# Altium PCB F143-MINI-KIT-902-FE-SMA_v1-0-2b.PcbDoc
Units mm, origin at the board's own origin, x right, y up, seen from the top; angles counter-clockwise.
Board outline 78.9 x 43.1 mm, 4 copper layers (Top, GND-Plane, VDD-Plane, Bottom), stack 1.614 mm thick; 101 components, 68 nets, 305 pads, 332 vias.
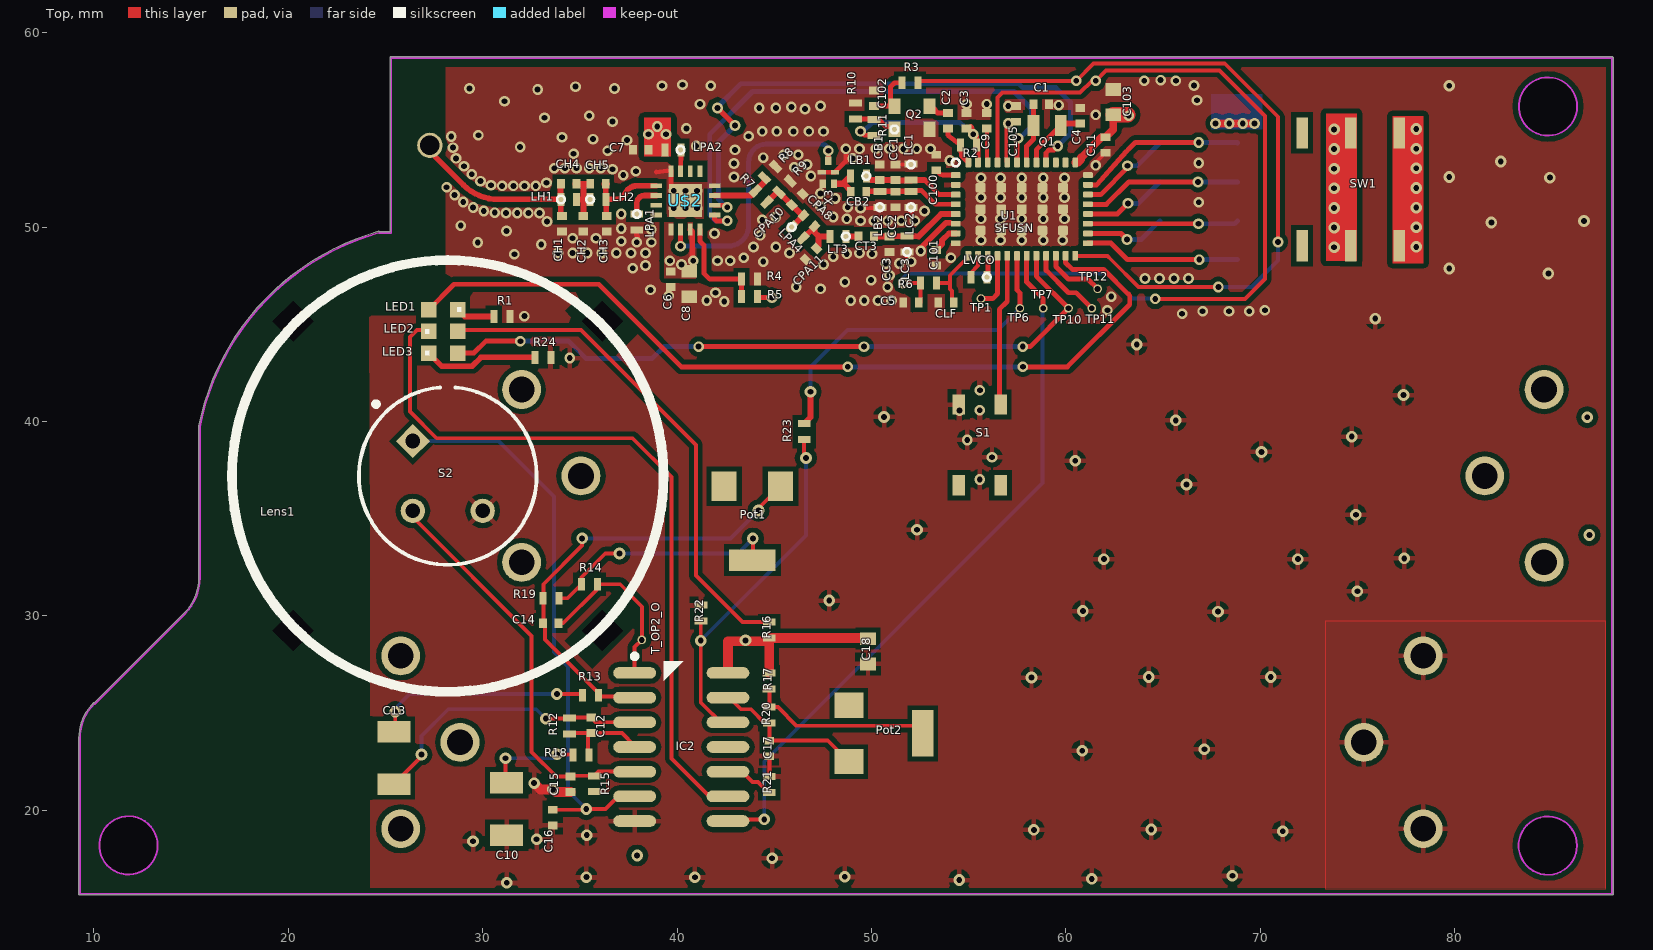
[diagram p0: Top view]
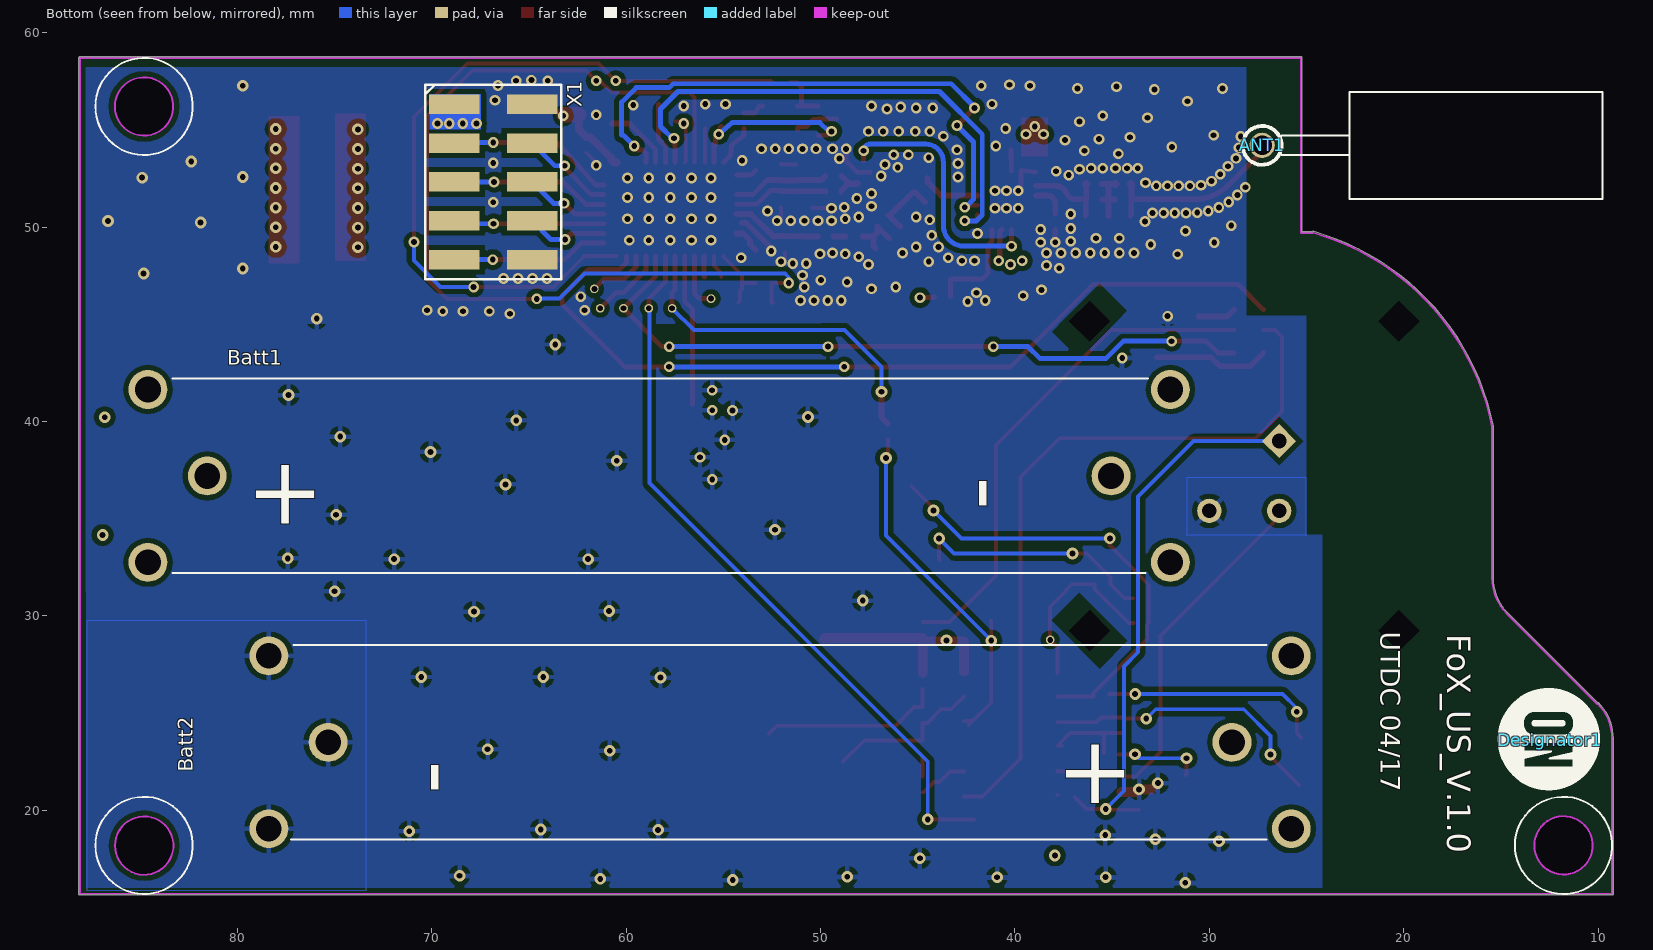
[diagram p1: Bottom view, seen from below]
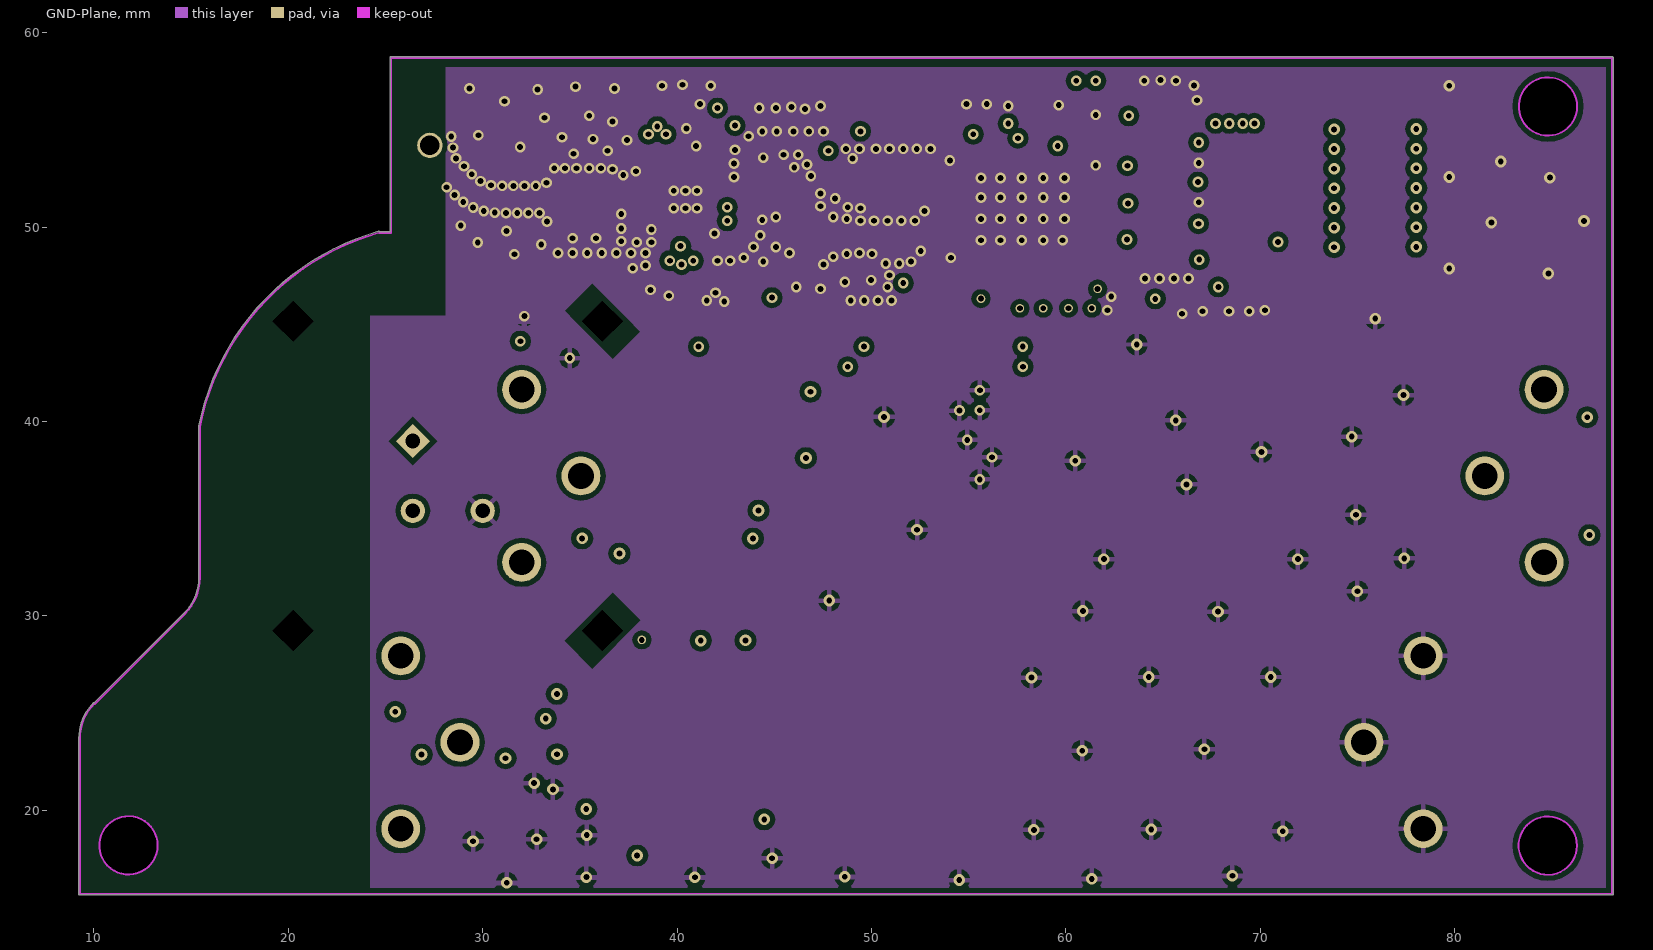
[diagram p2: GND-Plane]
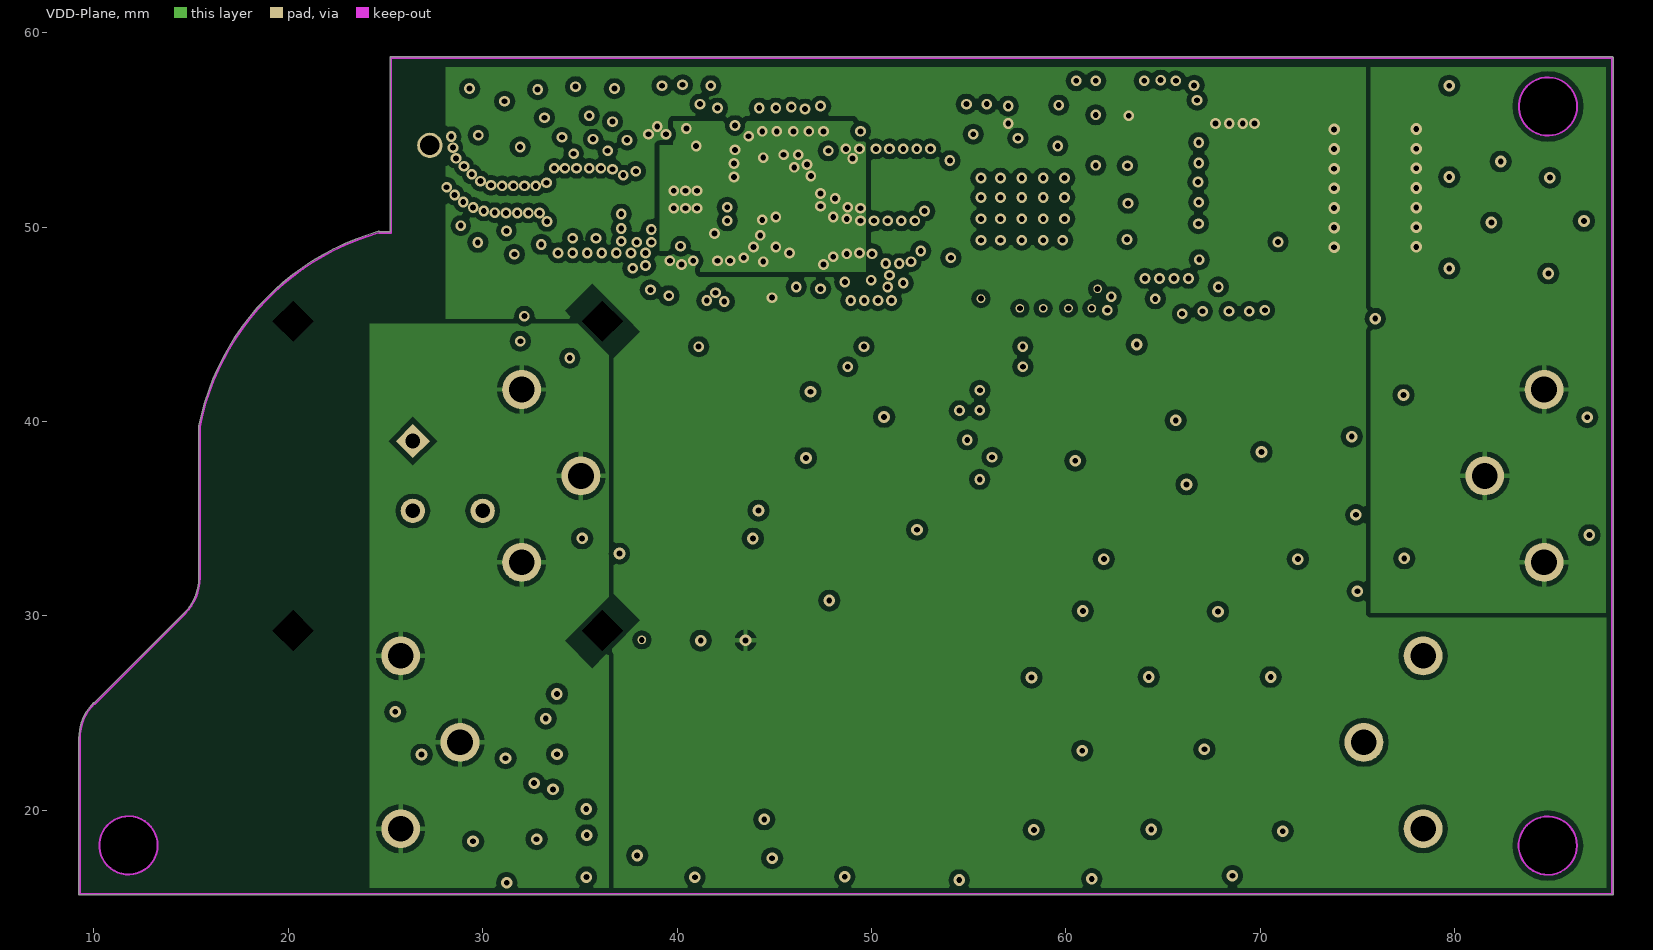
[diagram p3: VDD-Plane]

## Layer stack, top to bottom
Top Solder: solder mask 0.0102, Solder Resist, Dk 3.5
Top: signal copper 0.012
Dielectric 1: prepreg 0.16, FR-4, Dk 4
GND-Plane: signal copper 0.035
Dielectric 2: core 1.2, FR-4, Dk 4
VDD-Plane: signal copper 0.035
Dielectric 3: prepreg 0.16, FR-4, Dk 4
Bottom: signal copper 0.012
Bottom Solder: solder mask 0.0102, Solder Resist, Dk 3.5

## Board outline
9.289,15.65 cw(c9.289,15.7) 9.239,15.7 9.239,23.7 cw(c11.829,23.7) 9.997,25.532 cw(c10.033,25.496) 10.046,25.545 14.669,30.169 ccw(c14.705,30.133) 14.669,30.168 14.669,30.169 ccw(c12.909,31.929) 15.399,31.929 15.399,39.75 cw(c15.449,39.75) 15.413,39.786 cw(c28.209,37.22) 24.646,49.775 cw(c24.66,49.726) 24.704,49.75 25.239,49.75 25.239,58.7 cw(c25.289,58.7) 25.289,58.75 88.089,58.75 cw(c88.089,58.7) 88.139,58.7 88.139,15.7 cw(c88.089,15.7) 88.089,15.65
cut-out: 10.289,18.2 ccw(c11.789,18.2) 11.789,16.7 ccw(c11.789,18.2) 13.289,18.2 ccw(c11.789,18.2) 11.789,19.7 ccw(c11.789,18.2)
cut-out: 83.279,18.19 ccw(c84.779,18.19) 84.779,16.69 ccw(c84.779,18.19) 86.279,18.19 ccw(c84.779,18.19) 84.779,19.69 ccw(c84.779,18.19)
cut-out: 83.289,56.2 ccw(c84.789,56.2) 84.789,54.7 ccw(c84.789,56.2) 86.289,56.2 ccw(c84.789,56.2) 84.789,57.7 ccw(c84.789,56.2)

## Design rules (kind name [scope] priority, off if disabled: settings)
Clearance Clearance_2 [InNamedPolygon('Top-GND 2')] p1: gap=0.25
Clearance Clearance_1 [InNamedPolygon('Top-GND 2') Or  InNamedPolygon('VDDA') Or  InNamedPolygon('NetBatt1_-') Or  InNamedPolygon('Top-GND 1') Or  InNamedPolygon('VDD-Plane-GND') Or  InNamedPolygon('GND-Bottom') Or  InNamedPolygon('Top-VSUP 1') Or  InNamedPolygon('GND-Top') Or  InNamedPolygon('Bottom-GND') Or  InNamedPolygon('NetBatt1_+') Or  InNamedPolygon('GND-Plane-GND') Or  InNamedPolygon('PIR-GND_BL') Or  InNamedPolygon('VDD-Plane-VSUP') Or  InNamedPolygon('Batt-GND') Or  InNamedPolygon('GND_L01_P097') Or  InNamedPolygon('GND-Top') Or  InNamedPolygon('Batt_GND_BL') Or  InNamedPolygon('Top-VSUP')] p2: gap=0.254
Clearance [All] p3: gap=0.125
Clearance "Clearance (Same Net)" [All] p4: gap=0
HoleSize HoleSize_1 [All] p1: absolutevalues=TRUE maxlimit=2540 minlimit=0.2 maxpercent=80.000 minpercent=20.000
HoleSize [All] p2: absolutevalues=TRUE maxlimit=2.54 minlimit=0.025 maxpercent=80.000 minpercent=20.000
HoleToHoleClearance mdViaViaSameLayer [All] p1: gap=0.2 allowstackedmicrovias=TRUE
HoleToHoleClearance [All] p2: gap=0.254 allowstackedmicrovias=TRUE
PasteMaskExpansion mlMinCreamFrame [All] p1: expansion=0
PasteMaskExpansion [All] p2: expansion=0
PolygonConnect PolygonConnect_17 [All vs IsNamedPolygon('Top-VSUP 1')] p1: connectstyle=Direct reliefconductorwidth=0.254 reliefentries=4 polygonreliefangle="90 Angle" airgapwidth=0.254
PolygonConnect PolygonConnect_16 [All vs IsNamedPolygon('VDD-Plane-VSUP')] p2: connectstyle=Direct reliefconductorwidth=0.254 reliefentries=4 polygonreliefangle="90 Angle" airgapwidth=0.254
PolygonConnect PolygonConnect_15 [All vs IsNamedPolygon('Bottom-GND')] p3: connectstyle=Direct reliefconductorwidth=0.254 reliefentries=4 polygonreliefangle="90 Angle" airgapwidth=0.254
PolygonConnect PolygonConnect_14 [All vs IsNamedPolygon('Top-GND 2')] p4: connectstyle=Direct reliefconductorwidth=0.254 reliefentries=4 polygonreliefangle="90 Angle" airgapwidth=0.254
PolygonConnect PolygonConnect_13 [All vs IsNamedPolygon('Top-GND 2')] p5: connectstyle=Direct reliefconductorwidth=0.254 reliefentries=4 polygonreliefangle="90 Angle" airgapwidth=0.254
PolygonConnect PolygonConnect_12 [All vs IsNamedPolygon('GND-Plane-GND')] p6: connectstyle=Direct reliefconductorwidth=0.254 reliefentries=4 polygonreliefangle="90 Angle" airgapwidth=0.254
PolygonConnect PolygonConnect_11 [All vs IsNamedPolygon('Top-VSUP 1')] p7: connectstyle=Direct reliefconductorwidth=0.254 reliefentries=4 polygonreliefangle="90 Angle" airgapwidth=0.254
PolygonConnect PolygonConnect_10 [All vs IsNamedPolygon('GND-Plane-GND')] p8: connectstyle=Direct reliefconductorwidth=0.254 reliefentries=4 polygonreliefangle="90 Angle" airgapwidth=0.254
PolygonConnect PolygonConnect_9 [All vs IsNamedPolygon('GND_L01_P097')] p9: connectstyle=Direct reliefconductorwidth=0.254 reliefentries=4 polygonreliefangle="90 Angle" airgapwidth=0.254
PolygonConnect PolygonConnect_8 [All vs IsNamedPolygon('VDD-Plane-GND')] p10: connectstyle=Direct reliefconductorwidth=0.254 reliefentries=4 polygonreliefangle="90 Angle" airgapwidth=0.254
PolygonConnect PolygonConnect_7 [All vs IsNamedPolygon('Top-GND 2') Or  IsNamedPolygon('Top-GND 1')] p11: connectstyle=Direct reliefconductorwidth=0.254 reliefentries=4 polygonreliefangle="90 Angle" airgapwidth=0.254
PolygonConnect PolygonConnect_6 [All vs IsNamedPolygon('Top-GND 1') Or  IsNamedPolygon('Top-GND 2') Or  IsNamedPolygon('VDD-Plane-VSUP') Or  IsNamedPolygon('GND_L01_P097') Or  IsNamedPolygon('VDD-Plane-GND') Or  IsNamedPolygon('GND-Plane-GND') Or  IsNamedPolygon('Top-VSUP') Or  IsNamedPolygon('Top-VSUP 1') Or  IsNamedPolygon('Batt-GND') Or  IsNamedPolygon('GND-Top') Or  IsNamedPolygon('GND-Top') Or  IsNamedPolygon('PIR-GND_BL') Or  IsNamedPolygon('Top-GND 2') Or  IsNamedPolygon('GND-Bottom') Or  IsNamedPolygon('VDDA') Or  IsNamedPolygon('PIR-GND') Or  IsNamedPolygon('Batt_GND_BL') Or  IsNamedPolygon('Bottom-GND')] p12: connectstyle=Relief reliefconductorwidth=0.254 reliefentries=4 polygonreliefangle="90 Angle" airgapwidth=0.254
PolygonConnect PolygonConnect_5 [All vs IsNamedPolygon('VDDA')] p13: connectstyle=Direct reliefconductorwidth=0.254 reliefentries=4 polygonreliefangle="90 Angle" airgapwidth=0.254
PolygonConnect PolygonConnect_4 [All vs IsNamedPolygon('GND-Bottom')] p14: connectstyle=Direct reliefconductorwidth=0.254 reliefentries=4 polygonreliefangle="90 Angle" airgapwidth=0.254
PolygonConnect PolygonConnect_3 [All vs IsNamedPolygon('GND-Top')] p15: connectstyle=Direct reliefconductorwidth=0.254 reliefentries=4 polygonreliefangle="90 Angle" airgapwidth=0.254
PolygonConnect PolygonConnect_2 [All vs IsNamedPolygon('Bottom-GND')] p16: connectstyle=Direct reliefconductorwidth=0.254 reliefentries=4 polygonreliefangle="90 Angle" airgapwidth=0.254
PolygonConnect PolygonConnect_1 [All vs IsNamedPolygon('Batt-GND')] p17: connectstyle=Direct reliefconductorwidth=0.254 reliefentries=4 polygonreliefangle="90 Angle" airgapwidth=0.254
PolygonConnect ThermalVias [IsVia] p18: connectstyle=Direct reliefconductorwidth=0.254 reliefentries=4 polygonreliefangle="90 Angle" airgapwidth=0.254
PolygonConnect [All] p19: connectstyle=Relief reliefconductorwidth=0.254 reliefentries=4 polygonreliefangle="90 Angle" airgapwidth=0.254
RoomDefinition F143-MINI-KIT-902-FE-SMA_v1-0-2b [InComponentClass('F143-MINI-KIT-902-FE-SMA_v1-0-2b')] p1: confinementstyle=ConfineIn formatcopy=TRUE lockcomponents=FALSE outline 6.375,13.24 93.169,13.24 93.169,62.194 6.375,62.194
RoomDefinition Designator [InComponentClass('Designator')] p2: confinementstyle=ConfineIn formatcopy=TRUE lockcomponents=FALSE outline 6.538,13.24 93.151,13.24 93.151,62.026 6.538,62.026
RoutingVias [All] p1: holewidth=0.711 width=1.27 viastyle="Through Hole" minholewidth=0.711 minwidth=1.27 maxholewidth=0.711 maxwidth=1.27
SilkToSilkClearance [All] p1 off: silktosilkclearance=0.254
SilkToSolderMaskClearance [IsPad] p1 off: minsilkscreentomaskgap=0.254 clearancetoexposedcopper=TRUE
SolderMaskExpansion mlMinStopFrame [All] p1: expansion=0.051
SolderMaskExpansion [All] p2: expansion=0.102
Width Width_1 [All] p1: maxlimit=2540 minlimit=0.125 preferedwidth=0.254
Width [All] p2: maxlimit=0.254 minlimit=0.254 preferedwidth=0.254
25 further rules are at their usual default settings.

## Classes and differential pairs
component class F143-MINI-KIT-902-FE-SMA_v1-0-2b: ANT1 Batt1 Batt2 C1 C2 C3 C4 C5 C6 C7 C8 C9 C11 C100 C101 C102 C103 C105 CB1 CB2 CC1 CC2 CC3 CH1 CH2 CH3 CH4 CH5 CLF CPA8 CPA10 CPA11 CT3 LB1 LB2 LC1 LC2 LC3 LED1 LED3 LH1 LH2 LPA1 LPA2 LPA4 LT3 LVCO Q1 Q2 R1 R2 R3 R4 R5 R6 R7 R8 R9 R10 R11 R24 S1 SW1 TP1 TP6 TP7 TP10 TP11 TP12 U1 U$2 X1 X3
component class Designator: C10 C12 C13 C14 C15 C16 C17 C18 IC2 LED2 Lens1 Pot1 Pot2 R12 R13 R14 R15 R16 R17 R18 R19 R20 R21 R22 R23 S2 T_OP2_O

## Components (designator, comment, footprint, x,y, rotation, side; value= is the part's Value field where it differs from the comment)
ANT1 "SW868-TH13" "Spring Antenna" 27.289,54.2 r180 bottom locked
Batt1 "591/597" "Battery Clip AAA" 84.589,37.2 r180 bottom locked
Batt2 "591/597" "Battery Clip AAA" 25.789,23.5 r0 bottom locked
C1 "12pF" C0402 58.731,56.32 r180 top
C2 "10nF" C0402 53.931,55.47 r270 top
C3 "10nF" C0402 54.881,55.47 r270 top
C4 "12pF" C0402 60.731,55.72 r270 top
C5 "10nF" C0402 52.031,46.12 r180 top
C6 "10nF" C0402 39.681,47.32 r270 top
C7 "10nF" C0402 38.131,53.97 r180 top
C8 "4.7uF" C0603 40.631,47.07 r270 top
C9 "NC" C0402 55.931,55.47 r270 top
C10 "33uF" C1206 31.209,20.07 r90 top
C11 "100pF" C0402 62.031,54.22 r270 top
C12 "10nF" C0402 35.581,24.377 r270 top
C13 "33uF" C1206 25.469,22.69 r270 top
C14 "10nF" C0402 33.509,29.63 r0 top
C15 "100nF" C0402 34.519,21.34 r90 top
C16 "100nF" C0402 33.609,19.63 r90 top
C17 "100nF" C0402 44.739,23.18 r90 top
C18 "100nF" C0603 49.819,28.18 r90 top
C100 "100pF" C0402 53.331,53.32 r270 top
C101 "100pF" C0402 53.331,48.42 r270 top
C102 "10nF" C0402 50.131,56.62 r270 top
C103 "4.7uF" C0603 62.431,56.42 r90 top
C105 "100pF" C0402 57.431,55.82 r270 top
CB1 "NC" C0402 50.431,52.82 r90 top
CB2 "2.7pF" C0402 49.331,51.82 r0 top
CC1 "NC" C0402 51.231,52.82 r90 top
CC2 "NC" C0402 51.231,51.42 r90 top
CC3 "NC" C0402 50.931,49.12 r270 top
CH1 "3pF" C0402 34.081,50.17 r270 top
CH2 "4.3pF" C0402 35.181,50.17 r270 top
CH3 "3pF" C0402 36.381,50.17 r270 top
CH4 "NC" C0402 34.431,52.22 r0 top
CH5 "NC" C0402 35.931,52.22 r0 top
CLF "39pF" C0402 53.831,46.12 r180 top
CPA8 "0Ohm" C0402 46.781,50.32 r315 top
CPA10 "NC" C0402 46.181,51.42 r45 top
CPA11 "NC" C0402 46.881,48.62 r225 top
CT3 "2.2pF" C0402 49.731,49.52 r0 top
Designator1 "Comment" "ON Logo" 12.478,23.633 r270 bottom
IC2 "NCS36000" SOIC127P600X175-14AN 40.219,23.26 r0 top
LB1 "12nH" L0402 49.331,52.62 r180 top
LB2 "12nH" L0402 50.431,51.42 r90 top
LC1 "18nH" L0402 52.031,52.82 r270 top
LC2 "18nH" L0402 52.031,51.42 r90 top
LC3 "18nH" L0402 51.831,49.12 r90 top
LED1 "green" LED0603 27.976,45.755 r0 top
LED2 "yellow" "LED0603 - Y" 27.976,44.637 r180 top
LED3 "red" LED0603 27.976,43.519 r180 top
Lens1 "Fresnel Lens 8003-1" Lens 28.209,37.2 r45 top locked
LH1 "6.8nH" L0402 34.431,51.42 r0 top
LH2 "6.8nH" L0402 35.931,51.42 r0 top
LPA1 "3.3nH" L0402 37.931,50.27 r270 top
LPA2 "6.2nH" L0402 39.781,53.97 r180 top
LPA4 "NC" L0402 46.181,49.72 r315 top
LT3 "16nH" L0402 48.281,49.52 r180 top
LVCO "0OHM" L0402 55.531,47.42 r180 top
Pot1 "1M" "Poti-4mm SMD" 43.869,34.87 r180 top
Pot2 "500K" "Poti-4mm SMD" 50.639,23.96 r270 top
Q1 "32.768kHz" TF20 59.031,55.22 r0 top
Q2 "48MHz" X2016 52.081,55.62 r0 top
R1 "220" R0402#1 30.987,45.399 r180 top
R2 "2.7k" R0402#1 54.981,54.22 r180 top
R3 "600BEAD" R0402#1 51.981,57.42 r180 top
R4 "0" R0402#1 43.731,47.32 r180 top
R5 "NC" R0402#1 43.731,46.42 r180 top
R6 "12k" R0402#1 52.931,47.12 r0 top
R7 "180" R0402#1 44.331,51.57 r315 top
R8 "68" R0402#1 44.781,52.82 r225 top
R9 "68" R0402#1 45.531,52.07 r225 top
R10 "0 Ohm" R0402#1 49.181,55.97 r270 top
R11 "NC" R0402#1 50.131,55.12 r270 top
R12 "560K" R0402#2 34.469,24.35 r90 top
R13 "10K" R0402#2 35.559,25.92 r180 top
R14 "20K" R0402#2 35.501,31.632 r180 top
R15 "43K" R0402#2 35.739,21.37 r270 top
R16 "1K" R0402#2 44.739,29.27 r90 top
R17 "47K" R0402#2 44.729,26.65 r90 top
R18 "10K" R0402#2 35.059,22.85 r0 top
R19 "0-1M" R0402#2 33.519,30.91 r0 top
R20 "0-500K" R0402#2 44.746,24.902 r90 top
R21 "0 ohms" R0402#2 44.746,21.342 r270 top
R22 "0 ohms" R0402#2 41.229,30.14 r270 top
R23 "0 ohms" R0402#2 46.539,39.48 r90 top
R24 "220" R0402#1 33.102,43.295 r180 top
S1 "" TASTER_SMALL_SMD_4PAD 55.564,38.799 r270 top
S2 "D203S" ONSC-TO-5-3 28.209,37.2 r315 top locked
SW1 "MS-22D01" "SW MS-22D01" 74.649,51.94 r180 top locked
T_OP2_O "TP03" PIN-03 38.189,28.77 r90 top
TP1 "" PIN-03 55.631,46.32 r0 top
TP6 "" PIN-03 57.631,45.82 r0 top
TP7 "" PIN-03 58.831,45.82 r0 top
TP10 "" PIN-03 60.131,45.82 r95.6 top
TP11 "" PIN-03 61.331,45.82 r90 top
TP12 "" PIN-03 61.631,46.82 r0 top
U1 "SFUSN" QFN40 57.731,50.92 r0 top
U$2 "" QFN16_TH 40.931,51.12 r180 top
X1 "HM-2X52MM-SMD" HM-2MM-2X5-SMD 66.831,52.32 r270 bottom
X3 "" SAW_1.4X1.1X0.5 47.781,52.82 r270 top

## Footprints (in the part's own frame and the unit in brackets; to place one, negate y for a bottom-side part, rotate by r counter-clockwise, add the part's x,y. Pads: shape width x height; smd on the part's side, far side on the other; paste and mask are expansions set on the pad)
"Battery Clip AAA" [mm] "Battery Clip AAA Keystone 597/591"
  round 2 hole 1.32: +(0,-4.445) +(0,4.445) +(3.05,0) -(49.53,0) -(52.58,-4.445) -(52.58,4.445)
  silkscreen extent 1.27,-5 51.43,5, body extent -3.21,-5.29 55.83,5.54, height 9.74
C0402 [mm] "C0402"
  rect 0.4x0.5 smd: 1(-0.4,0) 2(0.4,0)
C0603 [mm] "C0603"
  rect 0.65x0.8 smd: 1(-0.65,0) 2(0.65,0)
C1206 [mm]
  rect 1.1x1.7 smd: 1(-1.35,-0.025) 2(1.35,-0.025)
  body extent -1.7,-0.93 1.7,0.87, height 1.3
HM-2MM-2X5-SMD [mm] "HM-2MM-2X5-SMD"
  rect 1x2.6 smd: P1(-4,-2) P2(-4,2) P3(-2,-2) P4(-2,2) P5(0,-2) P6(0,2) P7(2,-2) P8(2,2) P9(4,-2) P10(4,2)
  silkscreen extent -5,-3.5 5,3.5
L0402 [mm]
  rect 0.36x0.66 smd: 1(-0.41,0) 2(0.41,0)
  silkscreen extent -0.6,-0.2 -0.2,0.2
LED0603 [mil] "LED0603"
  rect 31.5x31.5 smd: A(-29.53,0) C(29.53,0)
  silkscreen extent 28,-5 37,5
"LED0603 - Y" [mil] "LED0603 yellow"
  rect 31.5x31.5 smd: A(-29.53,0) C(29.53,0)
  silkscreen extent 28,-5 37,5, body extent -31,-16 31,16, height 24
Lens [mm] "Fresnel Lens"
  round 0 hole 1.5 square unplated: Tab1(0,11.25) Tab2(0,-11.25) Tab3(-11.25,0) Tab4(11.25,0)
  silkscreen extent -11.1,-11.1 11.1,11.1
"ON Logo" [mm] "ON Logo"
  silkscreen extent -2.64,-2.67 2.59,2.54
ONSC-TO-5-3 [mm] "TO-5, 3-Leads, Diameter 9.145 mm"
  rect 1.25x1.25 hole 0.75: 1(-2.54,0)
  round 1.25 hole 0.75: 2(0,-2.54) 3(2.54,0)
  silkscreen extent -5.35,-4.57 4.57,4.57, body extent -4.58,-4.58 4.57,4.58, height 6.8
PIN-03 [mm] "PIN-03"
  round 0.45 hole 0.3: P$1(0,0)
"Poti-4mm SMD" [mm] "Bourns 3364W SMD 4mm"
  rect 1.3x1.5 smd: 1(-1.45,-1.8) 3(1.45,-1.8)
  rect 2.4x1.1 smd: 2(0,2)
  body extent -1.9,-2.23 1.9,2.27, height 1.01
QFN16_TH [mm] "QFN16_TH"
  rect 0.6x0.25 smd: 1(-1,0.5) 2(-1,0) 3(-1,-0.5) 4(-1,-1) 9(2,-1) 10(2,-0.5) 11(2,0) 12(2,0.5)
  rect 0.25x0.6 smd: 5(-0.25,-1.75) 6(0.25,-1.75) 7(0.75,-1.75) 8(1.25,-1.75) 13(1.25,1.25) 14(0.75,1.25) 15(0.25,1.25) 16(-0.25,1.25)
  rect 1.7x1.7 smd: 17(0.5,-0.25)
QFN40 [mm] "QFN40"
  rrect30% 0.5x0.3 smd: 1(-3.4,1.75) 2(-3.4,1.25) 3(-3.4,0.75) 4(-3.4,0.25) 5(-3.4,-0.25) 6(-3.4,-0.75) 7(-3.4,-1.25) 8(-3.4,-1.75) 21(3.4,-1.75) 22(3.4,-1.25) 23(3.4,-0.75) 24(3.4,-0.25) 25(3.4,0.25) 26(3.4,0.75) 27(3.4,1.25) 28(3.4,1.75)
  rrect30% 0.3x0.5 smd: 9(-2.75,-2.4) 10(-2.25,-2.4) 11(-1.75,-2.4) 12(-1.25,-2.4) 13(-0.75,-2.4) 14(-0.25,-2.4) 15(0.25,-2.4) 16(0.75,-2.4) 17(1.25,-2.4) 18(1.75,-2.4) 19(2.25,-2.4) 20(2.75,-2.4) 29(2.75,2.4) 30(2.25,2.4) 31(1.75,2.4) 32(1.25,2.4) 33(0.75,2.4) 34(0.25,2.4) 35(-0.25,2.4) 36(-0.75,2.4) 37(-1.25,2.4) 38(-1.75,2.4) 39(-2.25,2.4) 40(-2.75,2.4)
  rrect30% 0.5x0.5 smd: 41(-2.12,1.1) 42(-2.12,0) 43(-2.12,-1.1) 44(-1.06,1.1) 45(-1.06,0) 46(-1.06,-1.1) 47(0,1.1) 48(0,0) 49(0,-1.1) 50(1.06,-1.1) 51(1.06,0) 52(1.06,1.1) 53(2.12,-1.1) 54(2.12,0) 55(2.12,1.1)
  silkscreen extent -3.6,2.2 -3.2,2.6
R0402#1 [mm] "R0402"
  rect 0.36x0.66 smd: 3(-0.41,0) 4(0.41,0)
R0402#2 [mm] "R0402"
  rect 0.36x0.66 smd: 1(-0.41,0) 2(0.41,0)
  body extent -0.76,-0.46 0.76,0.46, height 0.34
SAW_1.4X1.1X0.5 [mm] "SAW_1.4X1.1X0.5"
  rect 0.425x0.325 smd: 1(-0.588,0) 3(0.588,-0.288) 4(0.588,0.288)
  rect 0.25x0.425 smd: 2(0,-0.338) 5(0,0.338)
SOIC127P600X175-14AN [mm]
  round 1 on Mech15: 0(0,0)
  oval 2.2x0.6 smd: 1(-2.4,3.81) 2(-2.4,2.54) 3(-2.4,1.27) 4(-2.4,0) 5(-2.4,-1.27) 6(-2.4,-2.54) 7(-2.4,-3.81) 8(2.4,-3.81) 9(2.4,-2.54) 10(2.4,-1.27) 11(2.4,0) 12(2.4,1.27) 13(2.4,2.54) 14(2.4,3.81)
  silkscreen extent -2.52,3.4 0.1,4.78, body extent -3.01,-4.32 3.01,4.33, height 1.75
"Spring Antenna" [mm] "SW868-TH13 Antenna"
  round 1.3 hole 1: 0(0,0)
  silkscreen extent -1,-2.75 17.5,2.75, body extent -0.45,-2.13 17.85,4.17, height 6.65
"SW MS-22D01" [mm] "MS-22D01 2P2T DC 6V 300mA"
  rect 0.6x1.6 smd: 1(0,2.9) 1(0,-2.9) 2(-2.5,2.9) 2(-2.5,-2.9) 3(2.5,2.9) 3(2.5,-2.9)
  body extent -4.44,-1.78 4.44,1.78, height 5.3
TASTER_SMALL_SMD_4PAD [mm] "TASTER_SMALL_SMD_4PAD"
  rect 1.05x0.65 smd: P1(-2.075,1.075) P2(2.075,1.075) P3(-2.075,-1.075) P4(2.075,-1.075)
TF20 [mm] "TF20"
  rect 0.6x1.1 smd: 1(-0.7,0) 2(0.7,0)
X2016 [mil] "X2016"
  rect 23.62x31.5 smd: 1(-35.43,-23.62) 2(35.43,-23.62) 3(35.43,23.62) 4(-35.43,23.62)
  silkscreen extent -43,-31 -28,-16

## Part data
ANT1: library part "spring antenna 868MHz 50Ohms 5W", "SW868-TH13 Antenna"
Batt1 Batt2: library part "Battery holder  AAA Keystone 591/597", "Batt Holder AAA Keystone 591/597"
C1 C2 C3 C4 C5 C6 C7 C9 C11 C12 C14 C15 C16 C17 C100 C101 C102 C105 CB1 CB2 CC1 CC2 CC3 CH1 CH2 CH3 CH4 CH5 CLF CPA8 CPA10 CPA11 CT3: library part C0402
C8 C103: library part C0603
C10 C13: library part C1206, "C1206"
C18: library part C0603, "C0603"
IC2: "PIR sensor"
LB1 LB2 LC1 LC2 LC3 LH1 LH2 LPA1 LPA2 LPA4 LT3 LVCO: library part L0402
LED1 LED3: library part LED0603
LED2: library part "LED0603 yellow", "LED0603-Y"
Lens1: library part "PIR Fresnel Lens 8003-1"
Pot1 Pot2: library part "Trimpot SMD", "Bourns 3364W SMD 4mm square Trimpot"
Q1: library part XTAL-2PINTF20
Q2: library part TCXO
R1 R2 R3 R4 R5 R6 R7 R8 R9 R10 R11 R12 R13 R14 R15 R16 R17 R18 R19 R20 R21 R22 R23 R24: library part R0402
S1: library part TASTER4-PAD-SMD-SMALL, "AXSEM tasters"
S2: library part "D203S PIR sensor", "PIR sensor"
SW1: library part "Slide Switch MS-22D01", "Slide Switch MS-22D01 2P2T"
T_OP2_O: "Test pad"
TP1 TP6 TP7 TP10 TP11 TP12: library part TP03, "Test pad"
U1: "AX-SFUS-1-01 for Sigfox RCZ2 application (AT variant), AX-SFUS-API-1-01 for Sigfox RCZ2 application (API variant), AX8052F143 for general purpose (non Sigfox) application"
U$2: library part RFX1010
X3: library part WFC30A0915FE

## Via types
v1: diameter 0.55/0.55/0.55/0.55 (per signal layer), hole 0.3, Top to Bottom, 223 vias
v2: diameter 0.6, hole 0.3, Top to Bottom, 49 vias
v3: diameter 0.6/0.6/0.6/0.6 (per signal layer), hole 0.3, Top to Bottom, 31 vias
v4: diameter 0.55, hole 0.3, Top to Bottom, 29 vias

## Nets (pads, with @x,y where several pads share a name; then routed paths per layer and width w, separated by ;. In a path a pad name is that pad's centre, name@x,y a point inside that pad or via, vN(x,y) a via of type N, cw(c..) or ccw(c..) an arc to the next point about the centre after c; other vN are vias at no path point)
ANT1: CB1.1 CC1.1 LB1.1 LC1.2 U1.3 | length 5.1
  Top w0.25: LC1.2@52.031,52.395 52.036,52.408 LC1.2@52.041,52.42 ; 52.731,52.42 53.481,51.67 U1.3@54.331,51.67
  Top w0.254: LC1.2@52.031,52.395 52.042,52.388 LC1.2@52.071,52.37
  Top w0.3: CC1.1 51.256,52.395 52.031,52.395 52.056,52.42 52.731,52.42
  Top w0.305: LB1.1@49.756,52.62 49.767,52.608 49.941,52.42 CB1.1 CC1.1 CC1.1@51.241,52.41
ANT2: CB2.2 CC2.2 LB2.2 LC2.2 U1.4 | length 4.9
  Top w0.25: LC2.2@52.071,51.87 52.581,51.87 53.281,51.17 U1.4
  Top w0.254: LC2.2@52.031,51.845 52.042,51.852 LC2.2@52.071,51.87
  Top w0.305: CB2.2 49.731,51.83 LB2.2@50.431,51.845 ; LB2.2@50.431,51.845 51.231,51.83 CC2.2@51.241,51.83 ; CC2.2 CC2.2@51.241,51.83 ; LC2.2@52.031,51.845 CC2.2@51.241,51.83
ANT3: CC3.1 CT3.2 LC3.2 U1.5 | length 4.7
  Top w0.3: CT3.2 CC3.1 50.931,49.53 LC3.2@51.831,49.545 ; 52.221,49.53 52.421,49.53 52.431,49.52 53.581,50.67 U1.5
  Top w0.305: LC3.2@51.832,49.545 52.221,49.53
APE_PA: U1.32 U$2.2 | length 29.6
  Top w0.254: U$2.2 42.481,51.12 v1(42.581,51.02) ; v1(42.081,56.12) v1(42.981,55.22) ; U1.32 58.981,53.82 59.131,53.97 59.381,53.97 v1(59.581,54.17)
  Bottom w0.254: v1(42.081,56.12) 42.081,56.17 43.281,57.37 57.581,57.37 57.781,57.17 59.481,57.17 60.231,56.42 60.231,54.72 60.131,54.72 v1(59.581,54.17) ; v1(42.581,51.02) 42.531,51.02 42.131,51.42 42.131,54.37 v1(42.981,55.22)
APEN_PA: U1.35 U$2.1 | length 27
  Top w0.254: U$2.1 41.931,50.42 42.031,50.32 v1(42.581,50.32) ; U1.35 57.481,54.47 v1(57.531,54.57)
  Bottom w0.254: v1(42.581,50.32) 41.981,50.32 41.681,50.62 41.681,54.77 43.881,56.97 57.331,56.97 58.231,56.07 58.231,55.17 57.631,54.57 v1(57.531,54.57)
CAL: C5.1 R6.3 U1.37 | length 49
  Top w0.2: v1(51.631,47.12) R6.3 52.521,46.12 C5.1 ; U1.37 56.481,56.67 56.731,56.92 60.731,56.92 61.331,57.52 v1(61.531,57.52) 62.063,58.052 64.661,58.052 64.663,58.054 67.897,58.054 70.231,55.72 70.231,47.32 69.217,46.306 v1(64.597,46.306)
  Bottom w0.2: v1(51.631,47.12) 51.631,47.42 51.831,47.62 62.131,47.62 63.431,46.32 v1@64.597,46.32
CLK: C2.1 Q2.3 | length 1.1
  Top w0.254: Q2.3 53.131,56.22 53.381,55.87 C2.1
CLK32N: C1.2 Q1.1 U1.34 | length 3.1
  Top w0.254: U1.34 57.981,54.17 58.331,54.52 Q1.1 C1.2
CLK32P: C4.2 Q1.2 U1.33 | length 3.5
  Top w0.254: U1.33 58.481,53.97 Q1.2
  Top w0.305: Q1.2 59.831,55.32 C4.2
CLKN: C2.2 R2.4 U1.40 | length 2.2
  Top w0.254: C2.2 53.931,54.72 R2.4 54.621,53.68 U1.40
CLKP: C3.2 R2.3 R11.4 U1.39 | length 9.9
  Top w0.254: v1(49.431,54.92) 49.631,54.72 50.121,54.72 R11.4 ; v1(55.231,54.77) v1@55.215,54.834 ; U1.39 55.481,54.28 R2.3 55.391,54.71 55.256,54.805 v1@55.215,54.834 ; v1@55.215,54.834 55.14,55.135 55.131,55.17 C3.2 v1@55.215,54.834
  Bottom w0.254: v1(49.431,54.92) 49.581,54.92 50.031,55.37 54.531,55.37 v1(55.231,54.77)
DBG_CLK: U1.25 X1.P5 | length 8.2
  Top w0.254: U1.25 62.081,51.17 63.231,52.32 66.784,52.32 v1(66.788,52.316)
  Bottom w0.254: v1(66.788,52.316) 68.827,52.316 X1.P5
DBG_DATA: U1.24 X1.P6 | length 4.4
  Top w0.254: U1.24 62.646,50.67 v1(63.193,51.217)
  Bottom w0.254: v1(63.193,51.217) 63.728,51.217 X1.P6
DBG_EN: U1.26 X1.P4 | length 5
  Top w0.254: U1.26@61.131,51.67 61.781,51.67 63.212,53.101 v1@63.331,53.22
  Bottom w0.254: v1(63.162,53.151) 63.662,53.151 X1.P4
FILT: CLF.1 R6.4 U1.9 | length 3.6
  Top w0.2: R6.4 54.031,47.12 ; CLF.1 54.131,46.22 54.131,46.72 54.031,46.82 54.031,47.12 ; U1.9 54.981,48.47 54.031,47.52 54.031,47.12
FPA1: CT3.1 LT3.1 | length 0.6
  Top w0.3: LT3.1@48.706,49.52 CT3.1
GND: Batt2.- C1.1 C3.1 C4.1 C5.2 C6.2 C7.2 C8.2 C9.1 C10.1 C11.2 C15.1 C16.1 C17.1 C18.1 C100.1 C101.2 C102.1 C103.2 C105.1 CB1.2 CC1.2 CC2.1 CC3.2 CH1.2 CH2.2 CH3.2 CLF.2 CPA10.2 CPA11.2 IC2.7 LB2.1 LC1.1 LC2.1 LC3.1 LPA1.2 Q2.2 R1.3 R4.3 R8.3 R9.3 R10.3 R15.2 R21.1 R22.1 R24.3 S1.P3 S2.3 U1.2 U1.6 U1.8 U1.28 U1.41 U1.42 U1.43 U1.44 U1.45 U1.46 U1.47 U1.48 U1.49 U1.50 U1.51 U1.52 U1.53 U1.54 U1.55 U$2.4 U$2.8 U$2.17 X1.P2 X1.P10 X3.2 X3.3 X3.5 | length 13.9
  Top w0.2: R21.1 C17.1@44.746,22.78 ; v1(49.431,50.97) 50.406,50.97 50.418,50.983 LB2.1@50.431,50.995 ; CC1.2 52.006,53.22 LC1.1@52.031,53.245 ; LC3.1@51.831,48.695 51.831,48.42 v1(52.031,48.22) ; LC2.1@52.031,50.995 52.031,50.52 v1(52.231,50.32) ; v1(61.531,53.17) 61.531,53.32 C11.2
  Top w0.25: X3.2 X3.5 48.681,53.382 v1(48.681,54.02)
  Top w0.254: 38.931,52.82 39.674,52.919 39.681,52.92 U$2.8 39.681,51.97 v1(39.831,51.87)
  Top w0.3: v1(37.931,49.22) 37.956,49.32 37.932,49.82 LPA1.2@37.931,49.845 ; v1@52.431,48.82 53.831,50.22 54.031,50.22
  Top w0.5: v2(32.649,21.4) 32.969,21.08 v2(33.619,21.08) 33.759,20.94 C15.1
  other v1: 55.564,37.021 56.199,38.164 54.929,39.053 54.522,40.563 55.564,40.577 55.573,41.607 34.484,43.261 32.15,45.419 65.975,45.539 67.031,45.67 68.381,45.67 69.431,45.67 62.131,45.72 70.231,45.72 42.431,46.17 41.531,46.22 48.931,46.22 49.631,46.22 50.331,46.22 51.031,46.22 62.331,46.42 39.581,46.47 41.981,46.62 38.631,46.77 47.381,46.82 46.131,46.92 50.831,46.92 48.631,47.17 49.981,47.27 64.062,47.355 64.81,47.355 65.558,47.355 66.306,47.355 50.931,47.52 37.719,47.879 38.381,48.02 47.531,48.07 50.731,48.12 51.431,48.12 44.431,48.22 42.081,48.27 42.731,48.27 43.431,48.42 54.081,48.42 48.031,48.47 31.633,48.599 48.731,48.62 50.031,48.62 33.881,48.67 34.631,48.67 35.381,48.67 36.131,48.67 36.881,48.67 37.631,48.67 38.381,48.67 45.781,48.67 49.381,48.67 52.531,48.77 43.931,48.97 45.081,48.97 33.02,49.107 29.755,49.208 38.681,49.22 37.131,49.27 55.631,49.32 56.631,49.32 57.731,49.32 58.831,49.32 59.831,49.32 34.631,49.42 35.831,49.42 44.281,49.57 41.931,49.67 31.227,49.8 38.681,49.87 37.131,49.92 28.875,50.071 49.431,50.32 50.131,50.32 50.831,50.32 51.531,50.32 44.381,50.37 48.731,50.42 55.631,50.42 56.631,50.42 57.731,50.42 58.831,50.42 59.931,50.42 45.081,50.52 48.031,50.52 37.131,50.67 52.731,50.82 39.831,50.97 40.431,50.97 41.031,50.97 48.781,51.02 47.381,51.07 66.828,51.278 48.131,51.47 55.631,51.52 56.631,51.52 57.731,51.52 58.831,51.52 59.931,51.52 47.381,51.72 40.431,51.87 41.031,51.87 55.631,52.52 56.631,52.52 57.731,52.52 58.831,52.52 59.931,52.52 42.931,52.57 46.881,52.62 37.231,52.67 37.881,52.87 36.681,52.97 33.681,53.02 34.231,53.02 34.831,53.02 35.481,53.02 36.081,53.02 46.031,53.07 46.681,53.22 42.931,53.27 66.831,53.292 54.031,53.42 49.031,53.52 44.431,53.57 45.481,53.72 46.231,53.72 34.681,53.77 36.431,53.92 42.981,53.97 49.381,54.02 50.231,54.02 50.931,54.02 51.631,54.02 52.331,54.02 53.031,54.02 31.931,54.12 40.981,54.17 37.431,54.47 35.681,54.52 34.081,54.62 43.681,54.67 29.781,54.72 44.381,54.92 45.131,54.92 45.981,54.92 46.781,54.92 47.531,54.92 40.481,55.07 36.681,55.42 33.181,55.62 35.481,55.72 61.531,55.77 46.581,56.07 44.231,56.12 45.081,56.12 45.881,56.17 47.381,56.22 57.031,56.22 59.631,56.27 41.181,56.32 54.881,56.32 55.931,56.32 31.131,56.47 66.741,56.522 32.831,57.07 29.331,57.12 36.781,57.12 34.781,57.22 39.231,57.27 41.731,57.27 66.59,57.284 40.281,57.32 64.031,57.52 65.654,57.519 64.871,57.554
  other v2: 31.239,16.28 68.559,16.64 44.889,17.54 29.509,18.41 32.779,18.52 58.349,19 64.389,19.02 67.119,23.14 58.229,26.83 64.259,26.86 70.529,26.86 67.819,30.22 74.989,31.27 61.949,32.92 52.344,34.432 74.909,35.2 66.203,36.762 60.477,37.979 70.054,38.435 65.646,40.056 50.647,40.234 63.644,43.958 75.909,45.29 84.809,47.61 79.709,47.87 81.879,50.23 86.639,50.31 84.889,52.54 79.709,52.57 82.359,53.37 79.709,57.27
  other v3: 54.509,16.42 61.329,16.48 35.339,16.57 40.919,16.56 48.629,16.59 35.359,18.73 71.149,18.93 60.839,23.07 60.869,30.25 47.829,30.79 71.929,32.92 77.399,32.96 74.699,39.22 77.359,41.36
  other v4: 33.308,50.29 31.204,50.724 31.78,50.724 32.355,50.724 32.93,50.724 30.629,50.741 30.06,50.825 29.514,51.008 29.009,51.284 28.561,51.644 28.15,52.047 31.006,52.116 31.582,52.116 32.157,52.116 32.733,52.116 30.432,52.149 33.284,52.281 29.896,52.36 29.447,52.718 29.04,53.125 28.633,53.532 28.473,54.085 28.388,54.654
L1: LVCO.2 U1.10 | length 1.3
  Top w0.2: LVCO.2@55.106,47.42 55.106,47.645 55.481,48.02 U1.10
L2: LVCO.1 U1.11 | length 1.1
  Top w0.254: LVCO.1@55.956,47.42 55.963,47.431 55.981,47.46 U1.11
LED0: LED1.A U1.19 | length 44.5
  Top w0.254: LED1.A 28.53,47.058 35.977,47.058 40.221,42.814 v4(48.78,42.814) ; v4(57.783,42.814) 60.074,42.814 63.281,46.02 63.281,46.47 63.231,46.52 ; U1.19 59.981,48.17 60.331,47.82 61.931,47.82 63.231,46.52 ; 63.231,46.57 63.231,46.52
  Bottom w0.254: v4(48.78,42.814) v4(57.783,42.814)
NetANT1_0: ANT1.0 CH1.1 CH4.1 LH1.1 | length 9.6
  Top w0.254: CH1.1@34.021,50.63 CH1.1
  Top w0.289: ANT1.0@27.135,54.046 29.017,52.164 ccw(c30.813,53.96) 30.813,51.42 LH1.1@34.006,51.42
  Top w0.3: CH1.1@34.021,50.63 34.021,51.405 34.014,51.412 34.006,51.42 34.006,52.195 CH4.1
  Top w0.406: CH4.1@34.021,52.21 CH4.1
NetBatt1_+: Batt1.+ SW1.2
  other v3: 78.012,48.98 78.012,49.99 78.012,51 78.012,52.01 78.012,53.02 78.012,54.03 78.012,55.04
NetBatt1_-: Batt1.- Batt2.+ | length 0
  Top w0.5: Batt2.+@28.839,23.4 Batt2.+@28.847,23.407
NetC9_2: C9.2 U1.38 | length 1.8
  Top w0.2: C9.2 55.931,53.32 U1.38
NetC10_2: C10.2 R18.1 | length 4.4
  Top w0.2: v2(31.179,22.68) 31.179,21.835 C10.2@31.194,21.82 ; v2(33.829,22.89) 33.839,22.88 R18.1@34.669,22.88
  Bottom w0.2: v2(31.179,22.68) 33.619,22.68 v2(33.829,22.89)
NetC12_1: C12.1 C13.2 IC2.3 R12.2 | length 15
  Top w0.2: C13.2@25.394,21.31 v2@26.906,22.823 ; v2(33.249,24.72) 34.429,24.72 R12.2 34.486,24.777 C12.1 35.828,24.53 IC2.3
  Bottom w0.2: v2(26.859,22.87) 26.859,23.823 28.236,25.2 32.759,25.2 v2@33.249,24.71
NetC12_2: C12.2 IC2.4 R12.1 R18.2 | length 5
  Top w0.2: R12.1 34.506,23.977 C12.2 ; R18.2@35.429,22.96 35.429,23.825 C12.2 ; IC2.4@37.584,23.327 37.821,23.327 37.171,23.977 C12.2
NetC13_1: C13.1 R13.2 | length 11.6
  Top w0.2: C13.1@25.284,23.75 25.509,23.975 v2(25.509,25.07) ; v2(33.819,25.988) 35.149,25.988 R13.2
  Bottom w0.2: v2(25.509,25.07) 25.509,25.251 26.247,25.988 v2(33.819,25.988)
NetC14_1: C14.1 IC2.2 Pot1.1 R13.1 R19.1 | length 23.3
  Top w0.2: C14.1 33.209,29.53 33.209,28.794 35.969,26.034 R13.1 ; C14.1@33.129,29.63 33.129,31.63 35.119,33.62 v2(35.119,33.99) ; R13.1@35.969,25.867 IC2.2@37.819,25.867 ; v2(44.189,35.42) 44.189,35.54 Pot1.1
  Bottom w0.2: v2(35.119,33.99) 42.759,33.99 v2(44.189,35.42)
NetC14_2: C14.2 IC2.1 R14.1 T_OP2_O.P$1 | length 9.3
  Top w0.2: C14.2 34.147,29.63 35.911,31.394 R14.1 37.077,31.632 37.361,31.348 37.361,31.298 38.189,30.47 T_OP2_O.P$1 37.821,28.402 IC2.1@37.821,27.07
NetC15_2: C15.2 IC2.5 R15.1 S2.2 | length 20.9
  Top w0.2: S2.2 26.413,35.076 32.519,28.97 32.519,23.01 33.789,21.74 C15.2 34.559,21.78 R15.1 35.949,21.99 IC2.5@37.754,21.99 ; IC2.5 IC2.5@37.754,21.99 ; IC2.5@37.821,22.057 IC2.5@37.754,21.99
NetC16_2: C16.2 IC2.6 S2.1 | length 28.8
  Top w0.2: C16.2 35.29,20.03 v2(35.329,20.069) 36.318,20.069 IC2.6@36.919,20.67 ; IC2.6@37.821,20.787 IC2.6@37.828,20.78
  Bottom w0.2: S2.1 30.813,38.996 33.669,36.14 33.669,28.13 34.389,27.41 34.389,21.009 v2(35.329,20.069)
NetC17_2: C17.2 IC2.13 Pot2.3 R20.1 | length 8.1
  Top w0.2: IC2.13@42.621,25.867 43.286,25.202 43.797,25.202 44.507,24.492 R20.1 44.746,23.6 47.749,23.6 Pot2.3
NetCB2_1: CB2.1 LB1.2 X3.4 | length 2.1
  Top w0.3: LB1.2@48.906,52.62 48.518,52.233 X3.4 48.081,52.22 48.581,52.22 48.931,51.87 CB2.1
NetCH2_1: CH2.1 CH4.2 CH5.1 LH1.2 LH2.1 | length 3.3
  Top w0.3: CH4.2 35.181,52.22 ; CH2.1 35.181,51.395 ; LH2.1@35.506,51.42 35.181,51.42 ; CH5.1 35.181,52.22 ; 35.181,51.395 35.181,51.42 ; 35.181,51.395 34.881,51.418 34.856,51.42 35.181,51.42 ; 35.181,51.42 35.181,52.22
  Top w0.406: CH4.2 CH4.2@34.841,52.21
NetCH3_1: CH3.1 CH5.2 LH2.2 U$2.9 | length 4.6
  Top w0.254: CH3.1@36.341,50.61 CH3.1
  Top w0.289: LH2.2@36.356,51.42 36.881,51.42 ccw(c36.881,51.908) 37.331,51.72 cw(c37.931,51.47) 37.931,52.12 U$2.9
  Top w0.3: CH5.2 36.331,51.42 LH2.2 36.356,51.42 36.356,50.61 CH3.1@36.341,50.61
  Top w0.406: CH5.2 CH5.2@36.341,52.21
NetCPA8_1: CPA8.1 CPA10.1 LPA4.1 R7.4 R9.4 | length 3.4
  Top w0.3: R7.4 45.121,51.78 45.255,51.78 46.432,50.603 CPA8.1 45.916,50.02 LPA4.1@45.88,50.02
NetCPA8_2: CPA8.2 CPA11.1 LPA4.2 LT3.2 | length 2.7
  Top w0.3: LPA4.2@46.481,49.42 CPA8.2@47.064,50.002 ; CPA8.2 CPA8.2@47.064,50.002 ; CPA11.1 47.281,49.02 47.281,49.52 ; LT3.2@47.856,49.52 47.281,49.52 ; CPA8.2@47.064,50.002 47.064,49.737 47.281,49.52
NetIC2_9: IC2.9 LED2.C | length 38
  Top w0.2: LED2.C@27.21,44.709 26.628,44.709 26.272,44.353 26.272,40.508 27.64,39.14 37.719,39.14 39.719,37.14 39.719,22.67 41.669,20.72 IC2.9
NetIC2_10: IC2.10 R21.2 | length 2.6
  Top w0.2: IC2.10 43.349,21.99 43.872,21.467 44.164,21.467 44.7,20.932 R21.2
NetIC2_12: IC2.12 R22.2 R23.1 | length 18.6
  Top w0.2: v2(41.219,28.73) 41.219,29.72 R22.2 ; v2@41.221,28.512 41.221,25.558 IC2.12@42.379,24.4 ; IC2.12@42.242,24.597 IC2.12@42.621,24.597 ; R23.1 46.539,38.21 v2(46.629,38.12)
  Bottom w0.2: v2(41.219,28.73) 46.629,34.14 v2(46.629,38.12)
NetLED1_C: LED1.C R1.4 | length 2
  Top w0.289: LED1.C 29.082,45.399 R1.4
NetLED2_A: LED2.A R16.2 | length 26.2
  Top w0.2: LED2.A@28.715,44.709 35.06,44.709 40.969,38.799 40.969,32.08 43.369,29.68 R16.2
NetLED3_C: LED3.C R24.4 | length 5.9
  Top w0.289: LED3.C 27.896,42.85 29.467,42.85 29.913,43.295 R24.4
NetLPA1_1: LPA1.1 U$2.10 | length 1.8
  Top w0.289: LPA1.1@37.931,50.695 37.931,51.22 cw(c38.331,51.22) 38.331,51.62 U$2.10
NetLPA2_1: LPA2.1 U$2.7 | length 1.1
  Top w0.254: U$2.7 40.191,52.88 LPA2.1@40.206,53.97
NetPot1_2: Pot1.2 R14.2 R19.2 | length 12.6
  Top w0.2: R19.2 34.369,30.91 R14.2 35.091,31.992 36.309,33.21 v2(37.039,33.21) ; Pot1.2 43.899,32.9 v2(43.899,33.98)
  Bottom w0.2: v2@37.019,33.21 v2(37.039,33.21) 43.129,33.21 v2(43.899,33.98)
NetPot2_2: Pot2.2 R17.1 R20.2 | length 9.4
  Top w0.2: R17.1@44.746,26.24 R20.2 45.186,25.312 46.148,24.35 52.249,24.35 Pot2.2
NetQ2_1: Q2.1 R10.4 R11.3 | length 2.3
  Top w0.254: R10.4 50.101,55.56 R11.3 50.371,55.53 50.731,55.17 51.131,55.17 Q2.1@51.181,55.02
NetR4_4: R4.4 R5.4 U$2.16 | length 5.3
  Top w0.254: U$2.16 41.181,49.27 41.381,49.07 41.381,47.62 41.681,47.32 R4.4 R5.4
NetR7_3: R7.3 R8.4 U$2.3 | length 3.1
  Top w0.254: 43.801,51.62 R7.3
  Top w0.289: U$2.3 43.801,51.62
  Top w0.3: R7.3 44.491,52.31 R8.4
NetU$2_14: U$2.14 X3.1 | length 13.6
  Top w0.254: v1(40.181,49.02) U$2.14 ; X3.1 v1(47.781,53.92)
  Bottom w0.254: v1(40.181,49.02) 42.631,49.02 ccw(c42.631,50.07) 43.681,50.07 43.681,53.32 cw(c44.606,53.345) 44.581,54.27 47.431,54.27 cw(c47.431,53.92) v1(47.781,53.92)
PB0: TP12.P$1 U1.18 | length 3.2
  Top w0.254: U1.18 59.481,47.97 60.131,47.32 61.131,47.32 TP12.P$1
PB2/VTCXO: R3.3 U1.20 | length 39.1
  Top w0.2: R3.3 52.431,57.42 52.531,57.52 v1(60.531,57.52) 61.421,58.41 68.165,58.41 70.906,55.67 v1(70.906,49.233) ; U1.20 62.131,48.52 62.331,48.32 63.731,46.92 v1(67.84,46.92)
  Bottom w0.2: v1(67.84,46.92) 69.549,46.92 70.906,48.276 v1(70.906,49.233)
PB3: U1.21 X1.P9 | length 8.1
  Top w0.254: U1.21 62.32,49.17 63.168,48.322 v1(66.854,48.322)
  Bottom w0.254: v1(66.854,48.322) 68.829,48.322 X1.P9
PB4/TX0: U1.22 X1.P8 | length 4.2
  Top w0.254: U1.22 62.828,49.67 v1(63.141,49.358)
  Bottom w0.254: v1(63.141,49.358) 63.869,49.358 X1.P8
PB5/RX0: U1.23 X1.P7 | length 7.8
  Top w0.254: U1.23 v1(66.815,50.17)
  Bottom w0.254: v1(66.815,50.17) 68.681,50.17 X1.P7
PC0: TP11.P$1 U1.17 | length 3.9
  Top w0.254: U1.17 58.981,47.77 60.131,46.62 60.531,46.62 TP11.P$1
PC1: LED3.A TP10.P$1 U1.16 | length 36.5
  Top w0.254: LED3.A 29.55,43.519 30.161,44.131 v4(31.941,44.131) ; v4(41.109,43.849) v4(49.614,43.849) ; v4(57.78,43.849) 58.159,43.849 TP10.P$1 58.481,47.47 U1.16
  Bottom w0.254: v4(31.941,44.131) 34.422,44.131 35.308,43.244 38.725,43.244 39.329,43.849 v4(41.109,43.849) ; v4(49.614,43.849) v4(57.78,43.849)
PC2: IC2.8 TP7.P$1 U1.15 | length 37.7
  Top w0.2: IC2.8@42.091,19.537 v2(44.482,19.537)
  Top w0.254: U1.15 57.981,47.17 58.831,46.32 TP7.P$1
  Bottom w0.2: v2(44.482,19.537) 44.482,22.511 58.801,36.83 58.801,45.79 TP7.P$1
PC3: R23.2 TP6.P$1 U1.14 | length 17.8
  Top w0.254: U1.14 57.481,46.77 57.631,46.62 TP6.P$1
  Top w0.3: R23.2 46.863,40.214 v2(46.863,41.529)
  Bottom w0.2: v2(46.863,41.529) 46.863,42.799 48.773,44.709 49.97,44.709 49.975,44.704 56.515,44.704 TP6.P$1
PC4: S1.P1 U1.13 | length 7.8
  Top w0.254: S1.P1@56.574,40.873 56.574,45.763 56.981,46.17 U1.13
RST_N: U1.27 X1.P3 | length 8.6
  Top w0.254: U1.27 61.581,52.17 63.113,53.886 ; 63.191,53.975 63.564,54.348 v1(66.829,54.348)
  Bottom w0.254: v1(66.829,54.348) 68.803,54.348 X1.P3
SYSC: TP1.P$1 U1.12 | length 2.9
  Top w0.254: TP1.P$1 56.231,46.32 56.481,46.57 U1.12
VDDA1: C100.2 U1.1 | length 1.1
  Top w0.254: C100.2 53.531,52.72 53.681,52.67 U1.1
VDDA2: C101.1 U1.7 | length 1.5
  Top w0.3: C101.1 53.631,49.12 53.631,49.32 53.981,49.67 U1.7
VSUP: C6.1 C7.1 C8.1 C11.1 C18.2 C103.1 C105.2 IC2.14 LPA2.2 R5.3 R16.1 R17.2 SW1.1 U1.29 U1.36 U$2.13 U$2.15 X1.P1 | length 22.1
  Top w0.2: U1.36 56.931,53.37 56.931,55.32 v1(57.031,55.32) 57.181,55.42 C105.2
  Top w0.254: R5.3 44.191,46.37 v1(44.881,46.37)
  Top w0.289: v1(38.531,54.77) v1@38.581,54.77 ; v1@39.356,54.695 v1(39.431,54.77) v1@39.381,54.77 ; U$2.15 40.784,49.767 40.784,48.317 v1(40.831,48.27)
  Top w0.406: U1.29 60.631,53.32 60.781,53.47 60.781,53.57 61.831,54.62 C11.1 62.431,55.02 C103.1 ; v1@63.181,55.77 v1(63.231,55.72) ; v1(67.695,55.326) v1(68.395,55.326) v1(69.095,55.326) v1(69.695,55.326)
  Top w0.5: IC2.14@42.621,27.137 42.621,28.702 R16.1@44.746,28.702 ; R17.2@44.746,27.06 R16.1@44.746,28.702 ; R16.1@44.746,28.83 R16.1@44.746,28.702 ; R16.1@44.769,28.83 R16.1 49.789,28.86 C18.2
  Top w0.813: C103.1 v1@63.181,55.77
  other v1: 40.231,48.07 39.631,48.27 38.981,55.17
  other v3: 43.521,28.744 73.792,48.961 73.792,49.971 73.792,50.981 73.792,51.991 73.792,53.001 73.792,54.011 73.792,55.021
VTCXO: C102.2 Q2.4 R3.4 | length 2.8
  Top w0.254: C102.2 Q2.4 50.981,56.32 50.981,57.22 51.181,57.42 R3.4
pads on no net: IC2.0 IC2.11 Lens1.Tab1 Lens1.Tab2 Lens1.Tab3 Lens1.Tab4 Pot1.3 Pot2.1 S1.P2 S1.P4 SW1.3 U1.30 U1.31 U$2.5 U$2.6 U$2.11 U$2.12
copper on no net:
  other v2: 37.949,17.68
  other v3: 86.919,34.16 86.809,40.22

## Polygon pours and split planes (outlines as drawn)
GND on Bottom "GND-Bottom" (solid, pour order 112): 87.818,45.447 87.769,29.66 87.769,15.86 24.189,15.951 24.189,34.17 25.009,34.17 25.009,37.1 25.009,45.447
no net on Bottom "PIR-GND_BL" (solid, remove dead copper, pour order 109): 25.009,37.1 31.159,37.1 31.159,34.17 25.009,34.17
no net on Bottom "Batt_GND_BL" (solid, remove dead copper, pour order 110): 73.374,29.76 87.744,29.76 87.744,15.9 73.374,15.9
GND on Bottom "Bottom-GND" (solid, remove dead copper, pour order 111): 28.11,45.02 87.822,45.02 87.822,58.22 28.11,58.22
no net on Top "Batt-GND" (solid, remove dead copper, pour order 98): 73.374,29.76 87.744,29.76 87.744,15.94 73.374,15.94
GND on Top "GND-Top" (solid, remove dead copper, pour order 101): 87.749,45.447 87.749,29.73 87.749,15.95 24.219,15.95 24.219,33.9 24.179,45.447
GND on Top "GND_L01_P097" (solid, remove dead copper, pour order 97): 53.931,48.12 61.531,48.12 61.531,53.72 53.931,53.72
GND on Top "Top-GND 1" (solid, remove dead copper, pour order 100): 51.746,45.02 87.749,45.02 87.749,58.22 47.749,58.22 53.731,54.862 53.731,48.05
GND on Top "Top-GND 2" (solid, remove dead copper, pour order 99): 48.157,58.22 28.109,58.22 28.109,45.02 51.985,45.02 53.931,47.99 53.931,54.979
VSUP on Top "Top-VSUP 1" (solid, remove dead copper, pour order 96): 39.354,50.247 39.354,47.343 41.158,47.343 41.158,50.247
GND on GND-Plane "GND-Plane-GND" (solid, remove dead copper, pour order 102): 28.109,45.02 87.749,45.02 87.749,58.22 28.109,58.22
GND on GND-Plane "GND-Top" (solid, remove dead copper, pour order 103): 87.749,45.447 87.749,29.731 87.749,15.951 24.219,15.951 24.219,45.447 25.004,45.447
GND on VDD-Plane "VDD-Plane-GND" (solid, remove dead copper, pour order 104): 39.104,54.197 39.104,48.793 41.204,48.793 41.204,47.693 49.708,47.693 49.708,55.447 39.804,55.447 39.804,54.197
VSUP on VDD-Plane "VDD-Plane-VSUP" (solid, remove dead copper, pour order 107): 28.109,58.22 75.666,58.22 75.666,45.02 87.793,45.02 28.109,45.02
VSUP on VDD-Plane "VDDA" (solid, pour order 108): 75.674,45.448 75.674,30.169 87.791,30.169 87.791,15.951 25.016,15.951 36.484,15.951 36.484,45.448 25.016,45.448
NetBatt1_+ on VDD-Plane "NetBatt1_+" (solid, pour order 105): 75.674,30.169 87.772,30.169 87.772,30.168 87.772,58.22 75.666,58.22 75.666,30.169 75.674,30.169
NetBatt1_- on VDD-Plane "NetBatt1_-" (solid, pour order 106): 24.2,15.954 36.486,15.954 36.486,42.492 36.486,45.017 24.154,45.017 24.2,45.017 24.2,15.954

## Keep-outs
Keep-Out Layer:
  circle w0.1: c11.789,18.2 r1.5
  circle w0.1: c84.789,56.2 r1.5
  circle w0.1: c84.779,18.19 r1.5
  lines w0.1: 10.033,25.496 ccw(c11.829,23.7) 9.289,23.7 9.289,15.7 88.089,15.7 88.089,58.7 25.289,58.7 25.289,49.7 24.66,49.7 ; 10.061,25.468 14.715,30.123 ; 14.705,30.133 ccw(c12.909,31.929) 15.449,31.929 ; 15.459,31.88 15.459,39.75 ; 15.461,39.748 cw(c28.209,37.2) 24.66,49.706

## Other copper
Top:
  rectangle net VSUP: 38.302,53.64 39.702,55.624
  rectangle net VSUP: 73.369,48.258 74.975,55.832
  rectangle net NetBatt1_+: 76.793,48.138 78.399,55.712
Bottom:
  rectangle net VSUP: 67.461,55.027 70.119,56.829

## Silkscreen, mask and mechanical layers (free items; w line width, h text height)
Bottom Overlay:
  circle w0.1: c84.789,56.2 r2.5
  circle w0.1: c84.789,18.2 r2.5
  circle w0.1: c11.789,18.2 r2.5
  text "-" at 42.959,35.43 h3.5 r90
  text "+" at 75.529,34.74 h3.5
  text "UTDC 04/17" at 21.187,29.187 h1 r90
  text "FoX_US_V.1.0" at 17.777,29.05 h1.2 r90
  text "-" at 71.159,20.83 h3.5 r90
  text "+" at 33.859,20.37 h3.5
Dimension:
  circle w0.1: c84.789,56.2 r1.5
  circle w0.1: c84.789,18.2 r1.5
  circle w0.1: c11.789,18.2 r1.5
  lines w0.1: 10.033,25.496 ccw(c11.829,23.7) 9.289,23.7 9.289,15.7 88.089,15.7 88.089,58.7 25.289,58.7 25.289,49.7 24.66,49.7 ; 10.051,25.478 14.705,30.133 ccw(c12.909,31.929) 15.449,31.929 ; 15.449,31.88 15.449,39.75 ; 15.461,39.768 cw(c28.209,37.22) 24.66,49.726
Measures:
  lines w0.1: 50.519,29.48 72.949,29.48 72.949,44.17
Document:
  text "Coplanar Wave Guide with GND Plane" at 26.005,63.382 h1.5
  text "Spacing 0.25mm, Prepreg thickness 0.156mm" at 26.005,61.832 h1.5
  text "-> 0.289mm Trace Width @ 50Ohm" at 26.005,60.282 h1.5
tDocu:
  lines w0.3: 63.231,51.22 63.231,47.12 70.431,47.12 70.431,57.32 63.231,57.32 63.231,53.22
bDocu:
  drawing of 1564 lines, arcs and shapes, not listed
  text "(C) AXSEM AG, 2017" at 70.029,46.319 h0.75
  text "REV 1-0-2b" at 85.679,45.719 h0.75
  text "F143-MINI-DVK-FE-SMA" at 70.029,45.019 h0.75
  text "902 MHz / 48 MHz TCXO" at 70.029,43.819 h0.75